# Altium PCB STM32_F4VX_M.PcbDoc
Units mil, origin at the board's own origin, x right, y up, seen from the top; angles counter-clockwise.
Board outline 5568 x 5116 mil, 2 copper layers (TopLayer, BottomLayer); 14 components, 100 nets, 250 pads, 0 vias.
Unrouted connection lines stored in the file: 138.
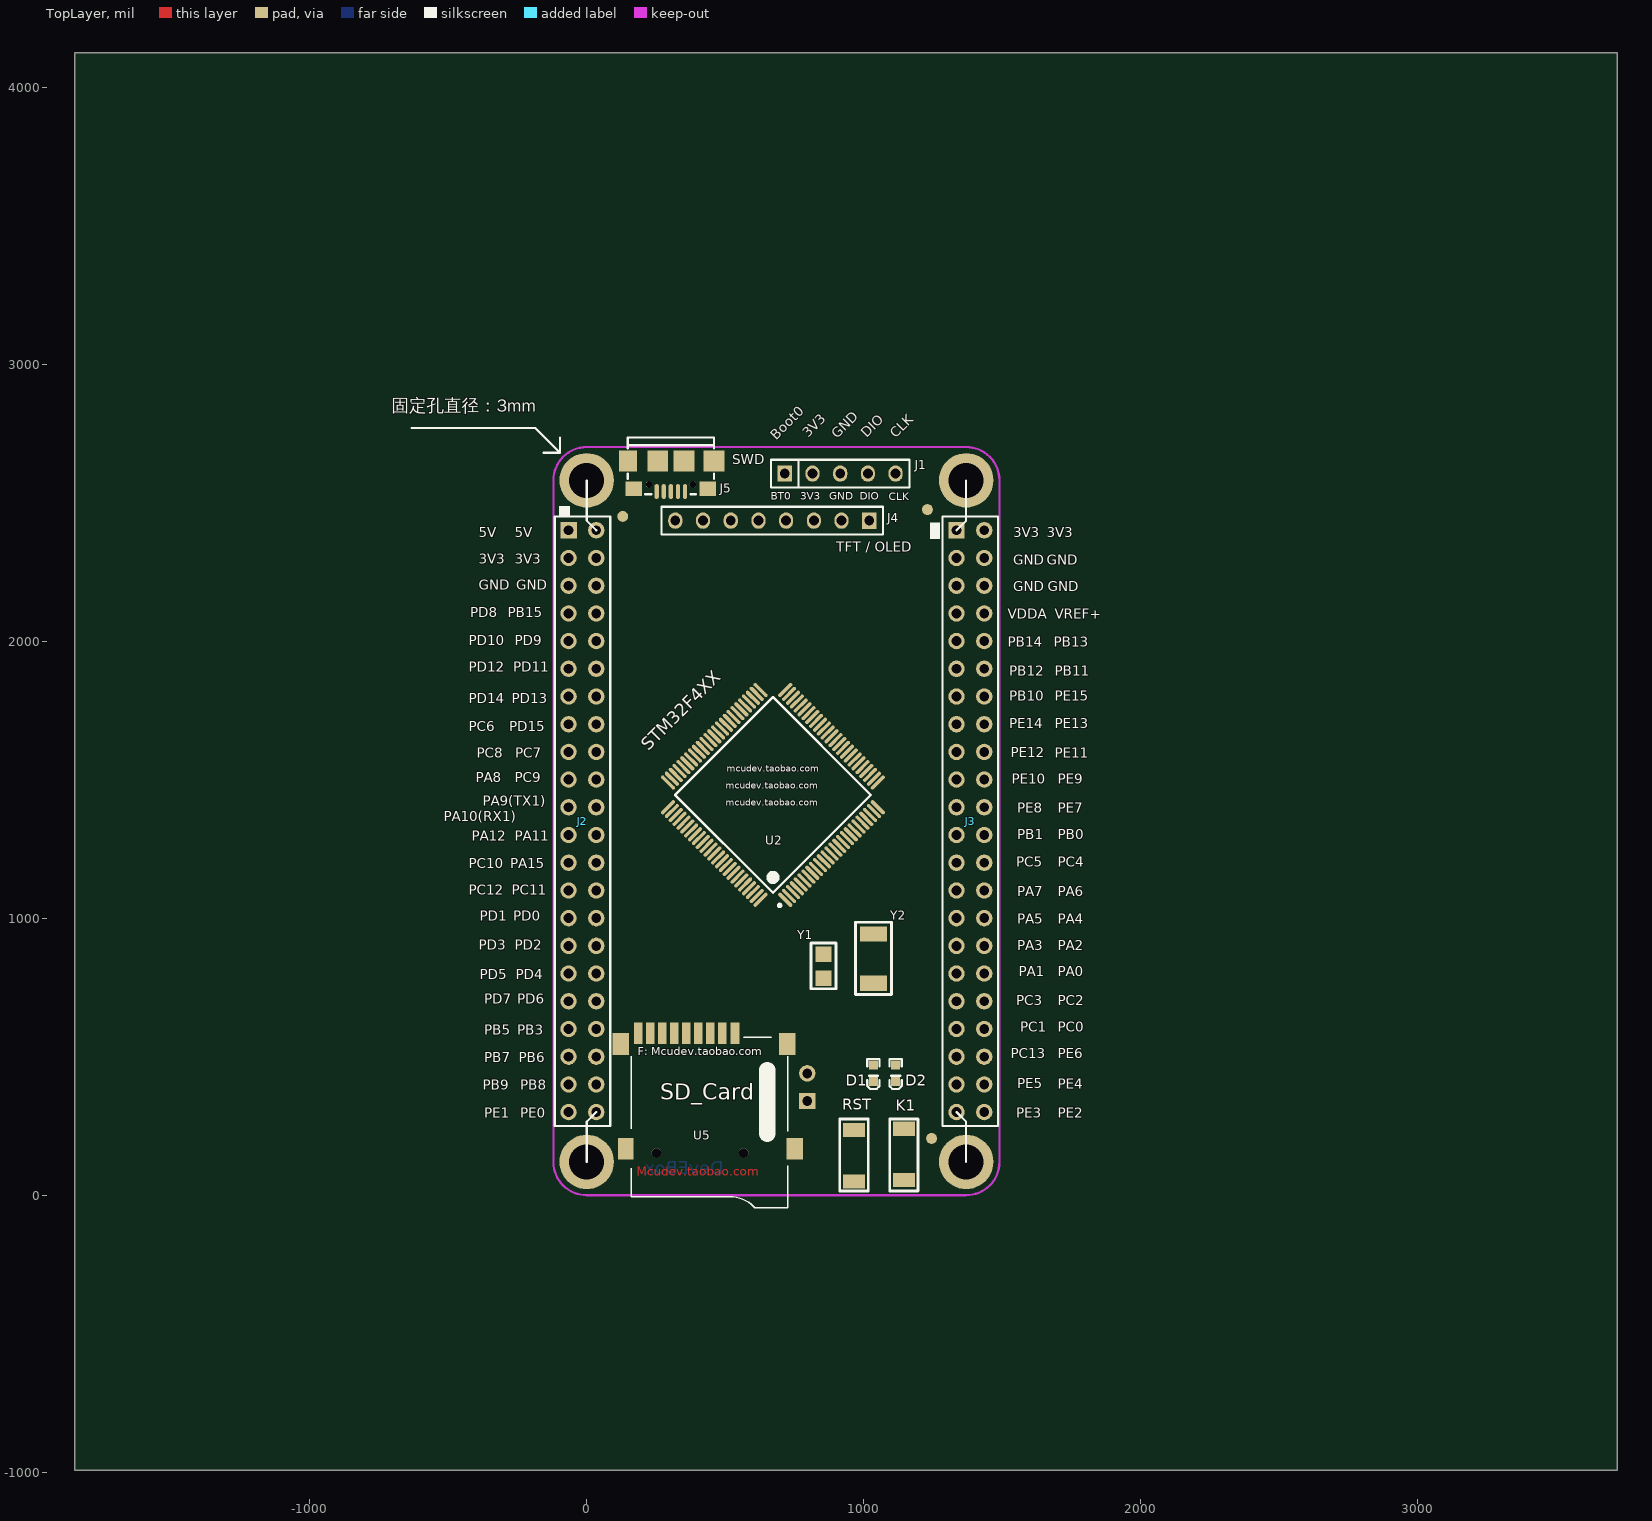
[diagram p0: TopLayer view]
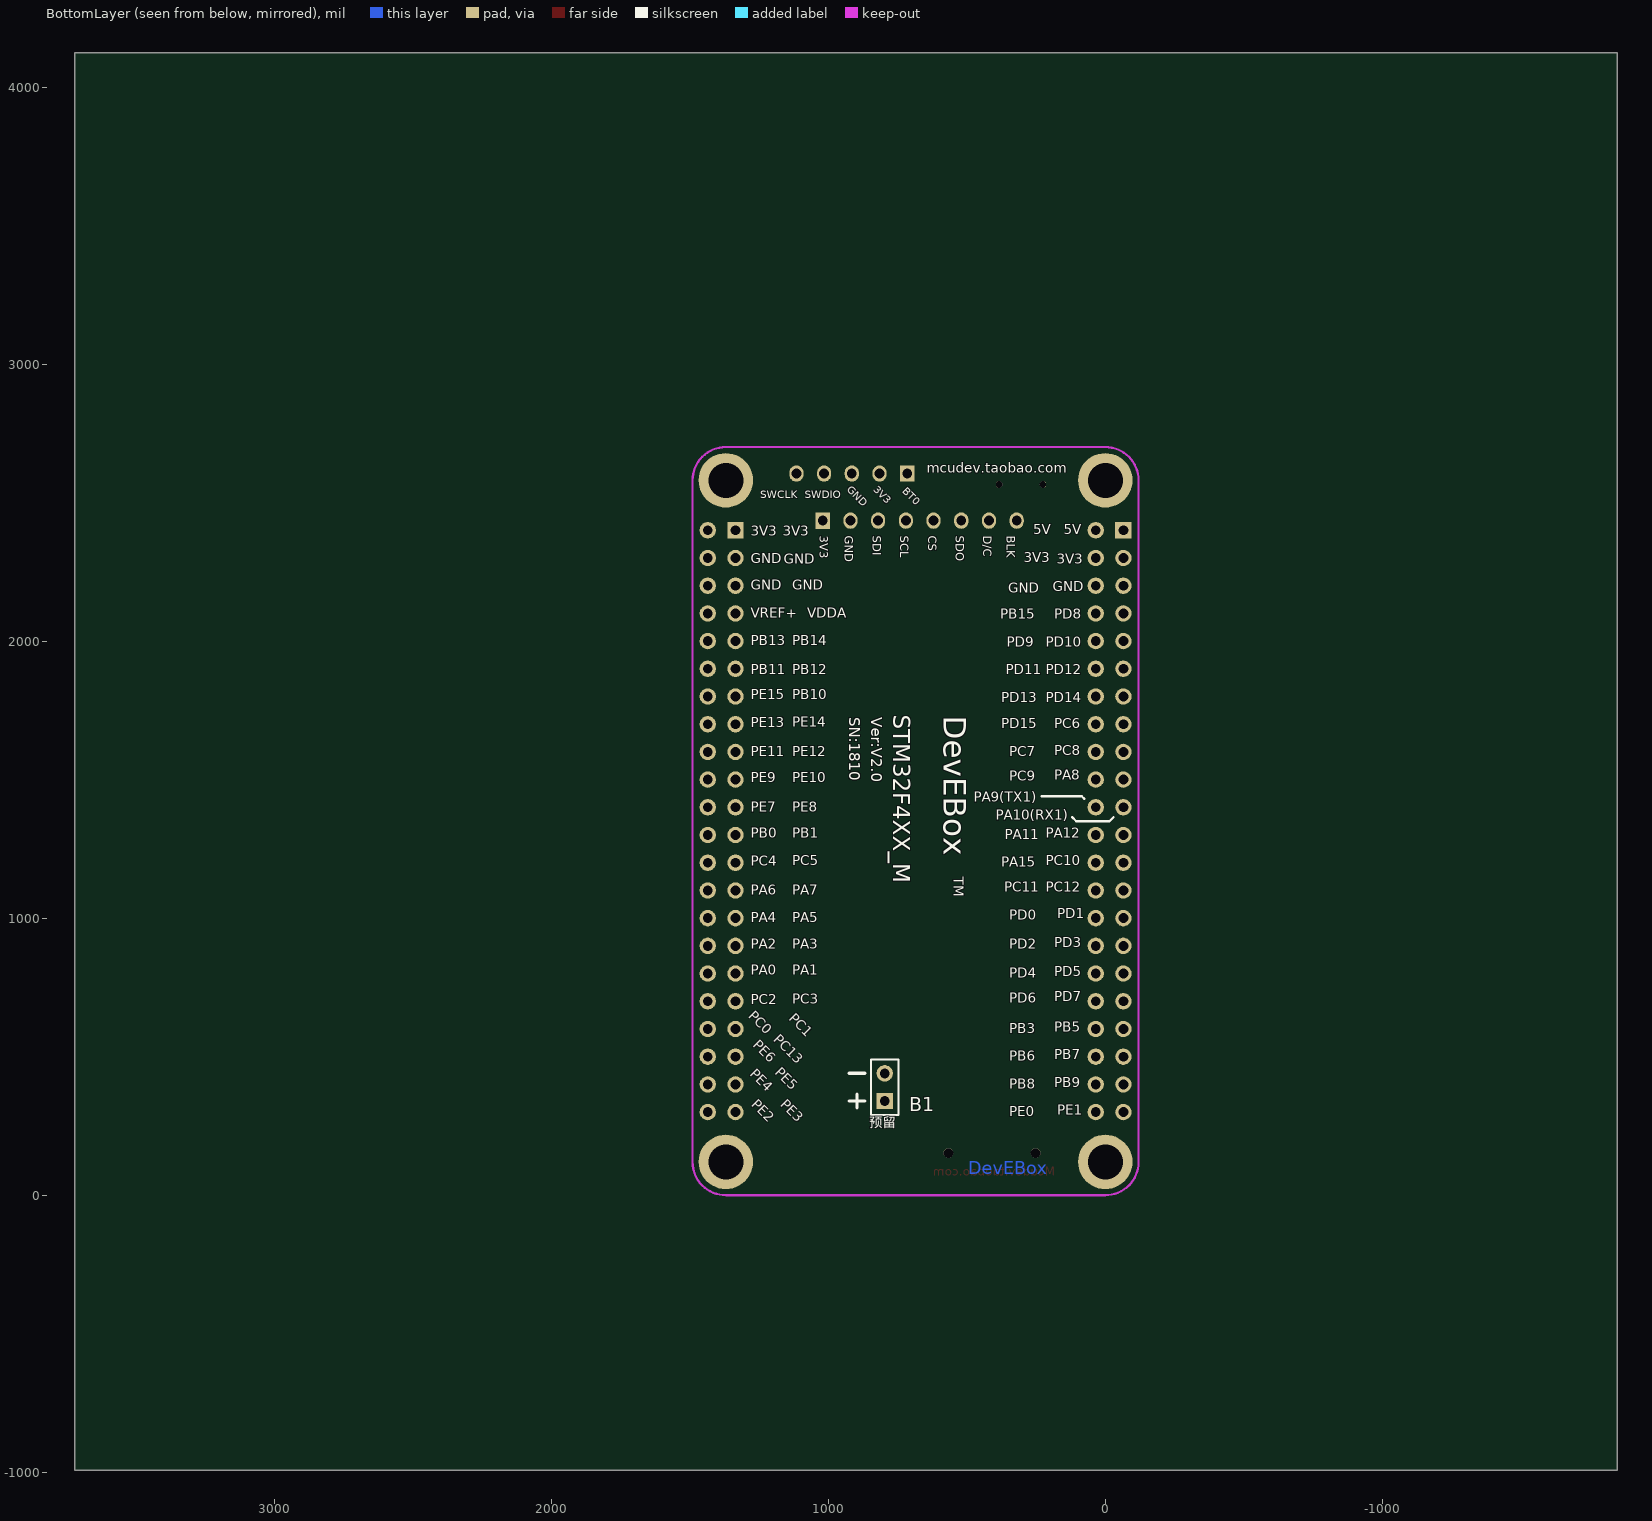
[diagram p1: BottomLayer view, seen from below]

## Layer stack, top to bottom
TopLayer: signal copper 1.4
Dielectric: core 12.6, FR-4, Dk 4.8
BottomLayer: signal copper 1.4

## Board outline
-1848,-992 -1848,4124 3720,4124 3720,-992

## Design rules (kind name [scope] priority, off if disabled: settings)
Clearance [All] p1: gap=7
ComponentClearance [All] p1: gap=1 collisioncheckmode=3 verticalgap=1 showdistances=FALSE
DiffPairsRouting DiffPairsRouting_1 [All] p2: maxlimit=10 minlimit=10 mostfreqgap=10 maxuncoupledlength=500
FabricationTestPointUsage TestPointUsage [All] p1: valid=0 allowmultiple=FALSE
FabricationTestPointUsage TestPointUsage_1 [All] p2: valid=0 allowmultiple=FALSE
FabricationTestpoint Testpoint [(IsPad And (OnTopLayer Or OnBottomLayer))] p1: side=3 testpointundercomponent=TRUE minsize=40 maxsize=100 preferedsize=60 minholesize=0 maxholesize=40 preferedholesize=32 testpointgrid=1 allowsidetop=TRUE allowsidebottom=TRUE usegrid=TRUE gridtolerance=0.01
FabricationTestpoint Testpoint_1 [(IsPad And (OnTopLayer Or OnBottomLayer))] p2: side=3 testpointundercomponent=TRUE minsize=40 maxsize=100 preferedsize=60 minholesize=20 maxholesize=40 preferedholesize=32 testpointgrid=1 allowsidetop=TRUE allowsidebottom=TRUE usegrid=TRUE gridtolerance=0.01
FanoutControl Fanout_LCC [IsLCC] p1: bgadir=Out bgaviamode=Centered fanoutstyle=Auto fanoutdirection=Alternating viagrid=1 // Fanout_LCC (Default Rule)
FanoutControl Fanout_BGA [IsBGA] p2: bgadir=Out bgaviamode=Centered fanoutstyle=Auto fanoutdirection=Alternating viagrid=1 // Fanout_BGA (Default Rule)
FanoutControl Fanout_Default [All] p4: bgadir=Out bgaviamode=Centered fanoutstyle=Auto fanoutdirection=Alternating viagrid=1 // Fanout_Default (Default Rule)
FanoutControl Fanout_Small [(CompPinCount < 5)] p5: bgadir=Out bgaviamode=Centered fanoutstyle=Auto fanoutdirection=OutThenIn viagrid=1 // Fanout_Small (Default Rule)
FanoutControl Fanout_BGA_1 [IsBGA] p6: bgadir=Out bgaviamode=Centered fanoutstyle=Auto fanoutdirection=Alternating viagrid=1 // Fanout_BGA (Default Rule)
FanoutControl Fanout_LCC_1 [IsLCC] p7: bgadir=Out bgaviamode=Centered fanoutstyle=Auto fanoutdirection=Alternating viagrid=1 // Fanout_LCC (Default Rule)
FanoutControl Fanout_SOIC_1 [IsSOIC] p8: bgadir=Out bgaviamode=Centered fanoutstyle=Auto fanoutdirection=Alternating viagrid=1 // Fanout_SOIC (Default Rule)
FanoutControl Fanout_Small_1 [(CompPinCount < 5)] p9: bgadir=Out bgaviamode=Centered fanoutstyle=Auto fanoutdirection=OutThenIn viagrid=1 // Fanout_Small (Default Rule)
FanoutControl Fanout_Default_1 [All] p10: bgadir=Out bgaviamode=Centered fanoutstyle=Auto fanoutdirection=Alternating viagrid=1 // Fanout_Default (Default Rule)
HoleSize HoleSize_1 [All] p2: absolutevalues=TRUE maxlimit=100 minlimit=1 maxpercent=80.000 minpercent=20.000
LayerPairs LayerPairs_1 [All] p2: enforce=TRUE
PasteMaskExpansion PasteMaskExpansion_1 [All] p2: expansion=0
PlaneClearance PlaneClearance_1 [All] p2: clearance=0
PlaneConnect [All] p1: planeconnectstyle=Direct reliefexpansion=20 reliefentries=4 reliefconductorwidth=10 reliefairgap=10
PolygonConnect [(InPadClass('All Pads'))] p1: connectstyle=Relief reliefconductorwidth=10 reliefentries=4 polygonreliefangle="90 Angle"
PolygonConnect PolygonConnect_1 [All] p2: connectstyle=Direct reliefconductorwidth=10 reliefentries=4 polygonreliefangle="90 Angle"
RoutingPriority RoutingPriority_1 [All] p2: routingpriority=0
RoutingTopology RoutingTopology_1 [All] p2: topology=Shortest
RoutingVias [All] p1: holewidth=12 width=20 viastyle="Through Hole" minholewidth=12 minwidth=20 maxholewidth=12 maxwidth=20
ShortCircuit ShortCircuit_1 [All] p2: allowed=FALSE
SilkscreenOverComponentPads [IsPad] p1: minsilkscreentomaskgap=10
SolderMaskExpansion [All] p1: expansion=4
SolderMaskExpansion SolderMaskExpansion_1 [All] p2: expansion=4
UnRoutedNet UnRoutedNet_1 [All] p2:
Width [All] p1: maxlimit=40 minlimit=7.87 preferedwidth=7.87 minimp=50.000000 maximp=50.000000 favimp=50.000000
19 further rules are at their usual default settings.

## Components (designator, comment, footprint, x,y, rotation, side; value= is the part's Value field where it differs from the comment)
B1 "BAT" SIP2-2.54mm 796,340 r90 bottom
D1 "LED" LED-0603 1035,470 r90 top
D2 "LED" LED-0603 1115,470 r90 top
J1 "SPI_1X5" SIP5-2.54mm 715,2605 r0 top
J2 "Header 22X2" IDE2X22 -65.21,2400.21 r270 top
J3 "Header 22X2" IDE2X22 1334.79,2400.21 r270 top
J4 "SIP8-2.54mm" HDR1X8 1020,2435 r180 top
J5 "Micro_USB" micro_USB 355,2540 r0 top
K1 "SW-PB" SW-SPST 1145,240 r270 top (schematic designator KUP)
RST "Key" SW-SPST 965,50 r90 top
U2 "STM32F407VET6" LQFP100 672.19,1445 r135 top
U5 "MiniSD" TF_SD 535,585 r180 top
Y1 "32.768K" JZ3215-32K 855,870 r270 top
Y2 "8M" JZ5032-8M 1035,765 r90 top

## Footprints (in the part's own frame and the unit in brackets; to place one, negate y for a bottom-side part, rotate by r counter-clockwise, add the part's x,y. Pads: shape width x height; smd on the part's side, far side on the other; paste and mask are expansions set on the pad)
HDR1X8 [mm] "Connector; Header; 8 Position"
  rect 1.3x1.5 hole 0.9: 1(0,0)
  oval 1.3x1.5 hole 0.9: 2(2.54,0) 3(5.08,0) 4(7.62,0) 5(10.16,0) 6(12.7,0) 7(15.24,0) 8(17.78,0)
  silkscreen extent -1.27,-1.27 19.05,1.27
IDE2X22 [mm]
  rect 1.5x1.5 hole 0.9: 1(0,0)
  round 1.5 hole 0.9: 2(0,2.54) 3(2.54,0) 4(2.54,2.54) 5(5.08,0) 6(5.08,2.54) 7(7.62,0) 8(7.62,2.54) 9(10.16,0) 10(10.16,2.54) 11(12.7,0) 12(12.7,2.54) 13(15.24,0) 14(15.24,2.54) 15(17.78,0) 16(17.78,2.54) 17(20.32,0) 18(20.32,2.54) 19(22.86,0) 20(22.86,2.54) 21(25.4,0) 22(25.4,2.54) 23(27.94,0) 24(27.94,2.54) 25(30.48,0) 26(30.48,2.54) 27(33.02,0) 28(33.02,2.54) 29(35.56,0) 30(35.56,2.54) 31(38.1,0) 32(38.1,2.54) 33(40.64,0) 34(40.64,2.54) 35(43.18,0) 36(43.18,2.54) 37(45.72,0) 38(45.72,2.54) 39(48.26,0) 40(48.26,2.54) 41(50.8,0) 42(50.8,2.54) 43(53.34,0) 44(53.34,2.54)
  silkscreen extent -1.27,-1.27 54.61,3.81
JZ3215-32K [mm]
  rect 1.4x1.5 smd paste-0.06 mask+0.05: 1(0,0) 2(2.2,0)
  silkscreen extent -1.02,-1.14 3.18,1.14
JZ5032-8M [mm]
  rect 1.4x2.5 smd: 1(0,0) 2(4.521,0)
  silkscreen extent -1.02,-1.65 5.59,1.65
LED-0603 [mil]
  rect 32x32 smd paste+0 mask+0: 1(0,0) 2(-60,0)
  silkscreen extent -86,-22 22,22
LQFP100 [mm] "LQFP, 100-Leads, Body 16.2x16.2mm (max), Pitch 0.50mm, IPC Medium Density"
  oval 1.7x0.33 smd: 1(-7.6,6) 2(-7.6,5.5) 3(-7.6,5) 4(-7.6,4.5) 5(-7.6,4) 6(-7.6,3.5) 7(-7.6,3) 8(-7.6,2.5) 9(-7.6,2) 10(-7.6,1.5) 11(-7.6,1) 12(-7.6,0.5) 13(-7.6,0) 14(-7.6,-0.5) 15(-7.6,-1) 16(-7.6,-1.5) 17(-7.6,-2) 18(-7.6,-2.5) 19(-7.6,-3) 20(-7.6,-3.5) 21(-7.6,-4) 22(-7.6,-4.5) 23(-7.6,-5) 24(-7.6,-5.5) 25(-7.6,-6) 51(7.6,-6) 52(7.6,-5.5) 53(7.6,-5) 54(7.6,-4.5) 55(7.6,-4) 56(7.6,-3.5) 57(7.6,-3) 58(7.6,-2.5) 59(7.6,-2) 60(7.6,-1.5) 61(7.6,-1) 62(7.6,-0.5) 63(7.6,0) 64(7.6,0.5) 65(7.6,1) 66(7.6,1.5) 67(7.6,2) 68(7.6,2.5) 69(7.6,3) 70(7.6,3.5) 71(7.6,4) 72(7.6,4.5) 73(7.6,5) 74(7.6,5.5) 75(7.6,6)
  oval 0.33x1.7 smd: 26(-6,-7.6) 27(-5.5,-7.6) 28(-5,-7.6) 29(-4.5,-7.6) 30(-4,-7.6) 31(-3.5,-7.6) 32(-3,-7.6) 33(-2.5,-7.6) 34(-2,-7.6) 35(-1.5,-7.6) 36(-1,-7.6) 37(-0.5,-7.6) 38(0,-7.6) 39(0.5,-7.6) 40(1,-7.6) 41(1.5,-7.6) 42(2,-7.6) 43(2.5,-7.6) 44(3,-7.6) 45(3.5,-7.6) 46(4,-7.6) 47(4.5,-7.6) 48(5,-7.6) 49(5.5,-7.6) 50(6,-7.6) 76(6,7.6) 77(5.5,7.6) 78(5,7.6) 79(4.5,7.6) 80(4,7.6) 81(3.5,7.6) 82(3,7.6) 83(2.5,7.6) 84(2,7.6) 85(1.5,7.6) 86(1,7.6) 87(0.5,7.6) 88(0,7.6) 89(-0.5,7.6) 90(-1,7.6) 91(-1.5,7.6) 92(-2,7.6) 93(-2.5,7.6) 94(-3,7.6) 95(-3.5,7.6) 96(-4,7.6) 97(-4.5,7.6) 98(-5,7.6) 99(-5.5,7.6) 100(-6,7.6)
  silkscreen extent -7.72,-6.35 6.35,6.85, body extent -7.05,-7.05 7.05,7.05, height 1.6
micro_USB [mm]
  oval 0.4x1.35 smd: 1(0,0) 2(-0.65,0) 3(-1.3,0) 4(-1.95,0) 5(-2.6,0)
  rect 1.651x1.9 smd: 6(-5.25,2.794)
  rect 1.5x1.3 smd: 6(-4.699,0.254) 9(2.099,0.254)
  rect 1.9x1.9 smd: 7(-2.5,2.794) 8(-0.1,2.794) 9(2.65,2.794)
  round 0.6 hole 0.6: ""(-3.3,0.644) ""(0.7,0.644)
  silkscreen extent -5.25,-0.25 2.65,4.94
SIP2-2.54mm [mm]
  rect 1.5x1.5 hole 0.9: 1(0,0)
  round 1.5 hole 0.9: 2(2.54,0)
  silkscreen extent -1.27,-1.27 3.81,1.27
SIP5-2.54mm [mm]
  rect 1.3x1.5 hole 0.9: 1(0,0)
  oval 1.3x1.5 hole 0.9: 2(2.54,0) 3(5.08,0) 4(7.62,0) 5(10.16,0)
  silkscreen extent -1.27,-1.27 11.43,1.27
SW-SPST [mm]
  rect 1.3x2 smd paste+0 mask+0.2: 1(0,0) 2(4.7,0)
  silkscreen extent -0.89,-1.3 5.72,1.3
TF_SD [mm]
  round 0.9 hole 0.9 unplated: 0(-0.8,11) 0(7.2,11)
  rect 0.85x2 smd: 1(0,0)
  rect 0.8x2 smd: 2(1.15,0) 3(2.25,0) 4(3.35,0) 5(4.45,0) 6(5.55,0) 7(6.65,0) 8(7.75,0) 9(8.85,0)
  rect 1.5x2 smd: 10(-5.5,10.6) 10(-4.8,1) 10(10.45,1)
  rect 1.4x2 smd: 10(10,10.6)
  silkscreen extent -4.87,0.36 9.49,16

## Part data
B1: library part BATTERY
J1: library part "Header 5H", "Header, 5-Pin, Right Angle"
J2 J3: "Header, 22-Pin, Dual row"
J4: library part "Header 8", "Header, 8-Pin"
J5: library part MiniUSB
RST: library part SW-PB
Y1: library part CRYSTAL, "晶振"
Y2: library part CRYSTAL, "Crystal"

## Free pads (board coordinates)
  round 196.85 hole 125.98: ""(0,120.21) ""(0,2580.21) ""(1369.58,120.21) ""(1369.58,2580.21)
  round 39.37 smd: ""(130,2450) ""(1230,2475) ""(1245,205)

## Nets (pads, with @x,y where several pads share a name; then routed paths per layer and width w, separated by ;. In a path a pad name is that pad's centre, name@x,y a point inside that pad or via, vN(x,y) a via of type N, cw(c..) or ccw(c..) an arc to the next point about the centre after c; other vN are vias at no path point)
3V3: D2.1 J1.2 J2.3 J2.4 J3.1 J3.2 J4.1 U2.11 U2.19 U2.28 U2.50 U2.75 U2.100 U5.4
5V: J2.1 J2.2
BOOT0: J1.1 U2.94
F_CS: J2.26 U2.77
GND: B1.2 D1.2 J1.3 J2.5 J2.6 J3.3 J3.4 J3.5 J3.6 J4.2 J5.5 J5.6 J5.7 J5.8 J5.9 RST.1 U2.10 U2.20 U2.27 U2.74 U2.99 U5.6 U5.10
KEY0: J3.44 U2.1
NetB1_1: B1.1
NetC10_2: U2.12 Y2.1
NetC11_1: U2.13 Y2.2
NetC21_2: U2.49
NetC22_2: U2.73
NetD1_1: D1.1
NetD2_2: D2.2
NetJ5_1: J5.1
NetJ5_2: J5.2
NetJ5_3: J5.3
NetK1_1: K1.1
PA0/WK_UP: J3.34 K1.2 U2.23
PA1: J3.33 U2.24
PA2: J3.32 U2.25
PA3: J3.31 U2.26
PA4: J3.30 U2.29
PA5: J3.29 U2.30
PA6: J3.28 U2.31
PA7: J3.27 U2.32
PA8: J2.19 U2.67
PA9/TXD1: J2.22 U2.68
PA10/RXD1: J2.21 U2.69
PA11/USB_DM: J2.24 U2.70
PA12/USB_DP: J2.23 U2.71
PA13_SWDIO: J1.4 U2.72
PA14_SWCLK: J1.5 U2.76
PB0: J3.24 U2.35
PB1: J3.23 J4.8 U2.36
PB2/BOOT1: U2.37
PB3/TDO: J2.38 U2.89
PB4/TRST: U2.90
PB5: J2.37 U2.91
PB6: J2.40 U2.92
PB7: J2.39 U2.93
PB8: J2.42 U2.95
PB9: J2.41 U2.96
PB10: J3.13 U2.47
PB11: J3.12 U2.48
PB12: J3.11 J4.5 U2.51
PB13: J3.10 J4.4 U2.52
PB14: J3.9 J4.6 U2.53
PB15: J2.8 J4.3 U2.54
PC0: J3.38 U2.15
PC1: J3.37 U2.16
PC2: J3.36 U2.17
PC3: J3.35 U2.18
PC4: J3.26 U2.33
PC5: J3.25 J4.7 U2.34
PC6: J2.15 U2.63
PC7: J2.18 U2.64
PC8: J2.17 U2.65 U5.7
PC9: J2.20 U2.66 U5.8
PC10: J2.25 U2.78 U5.1
PC11: J2.28 U2.79 U5.2
PC12: J2.27 U2.80 U5.5
PC13: J3.39 U2.7
PC14: U2.8 Y1.2
PC15: U2.9 Y1.1
PD0: J2.30 U2.81
PD1: J2.29 U2.82
PD2: J2.32 U2.83 U5.3
PD3: J2.31 U2.84
PD4: J2.34 U2.85
PD5: J2.33 U2.86
PD6: J2.36 U2.87
PD7: J2.35 U2.88
PD8: J2.7 U2.55
PD9: J2.10 U2.56
PD10: J2.9 U2.57
PD11: J2.12 U2.58
PD12: J2.11 U2.59
PD13: J2.14 U2.60
PD14: J2.13 U2.61
PD15: J2.16 U2.62
PE0: J2.44 U2.97
PE1: J2.43 U2.98
PE3: J3.43 U2.2
PE4: J3.42 U2.3
PE5: J3.41 U2.4
PE6: J3.40 U2.5
PE7: J3.22 U2.38
PE8: J3.21 U2.39
PE9: J3.20 U2.40
PE10: J3.19 U2.41
PE11: J3.18 U2.42
PE12: J3.17 U2.43
PE13: J3.16 U2.44
PE14: J3.15 U2.45
PE15: J3.14 U2.46
RST: RST.2 U2.14
SD_NC: U5.9
VBAT: U2.6
VDDA: J3.7 U2.22
VREF+: J3.8 U2.21
pads on no net: J5. J5.4 U5.0

## Keep-outs
KeepOutLayer:
  lines w8: -120.21,120.21 ccw(c0,120.21) 0,0 1369.58,0 ccw(c1369.58,120.21) 1489.79,120.21 1489.79,2580.21 ccw(c1369.58,2580.21) 1369.58,2700.42 0,2700.42 ccw(c0,2580.21) -120.21,2580.21 -120.21,120.21

## Other copper
TopLayer:
  text "Mcudev.taobao.com" at 180,60 h55
BottomLayer:
  text "DevEBox" at 495,60 h80

## Silkscreen, mask and mechanical layers (free items; w line width, h text height)
TopOverlay:
  rectangle: 1240,2368 1276,2428
  rectangle: -99.82,2450.21 -60,2487.35
  lines w8: -631.67,2769.67 -185.67,2769.67 -96,2680 ; -156,2680 -96,2680 ; -96,2735 -96,2680 ; 0,120.21 0,265.42 34.79,300.21 ; 0,2580.21 0,2435 34.79,2400.21 ; 1334.79,300.21 1369.58,265.42 1369.58,120.21 ; 1334.79,2400.21 1369.58,2435 1369.58,2580.21
  text "固定孔直径：3mm" at -704,2812 h80
  text "DIO" at 1010.98,2732.2 h35 r45
  text "3V3" at 800,2732 h35 r45
  text "CLK" at 1114.91,2730.15 h35 r45
  text "GND" at 904,2728 h35 r45
  text "Boot0" at 684,2724 h35 r45
  text "SWD" at 525,2625 h60
  text "BT0" at 665,2510 h28
  text "3V3" at 770,2510 h28
  text "GND" at 875,2510 h28
  text "DIO" at 985,2510 h28
  text "CLK" at 1091,2509 h28
  text "5V" at -260.21,2375.42 h35
  text "3V3" at 1539.79,2375.42 h35
  text "3V3" at 1659.79,2375.42 h35
  text "5V" at -390,2375 h35
  text "TFT / OLED" at 900,2310.13 h60
  text "3V3" at -390,2280 h35
  text "3V3" at -260,2280 h35
  text "GND" at 1539.79,2275.42 h35
  text "GND" at 1659.79,2275.42 h35
  text "GND" at -390,2185 h35
  text "GND" at -255,2185 h35
  text "GND" at 1539.79,2180.42 h35
  text "GND" at 1664.79,2180.42 h35
  text "PD8" at -420.21,2085.42 h35
  text "PB15" at -285.21,2085.42 h35
  text "VDDA" at 1520,2080 h35
  text "VREF+" at 1690,2080 h35
  text "PD10" at -425,1985 h35
  text "PD9" at -260,1985 h35
  text "PB14" at 1520,1980 h35
  text "PB13" at 1685,1980 h35
  text "PD12" at -425.21,1890.42 h35
  text "PD11" at -265,1890 h35
  text "PB12" at 1525,1875 h35
  text "PB11" at 1690,1875 h35
  text "PB10" at 1524.79,1785.42 h35
  text "PE15" at 1690,1785 h35
  text "PD13" at -270.21,1775.42 h35
  text "PD14" at -425,1775 h35
  text "PE14" at 1524.79,1685.42 h35
  text "PE13" at 1690,1685 h35
  text "PD15" at -280.21,1675.42 h35
  text "PC6" at -425,1675 h35
  text "STM32F4XX" at 235,1590 h80 r45
  text "PE12" at 1529.79,1580.42 h35
  text "PC7" at -257.53,1579.38 h35
  text "PE11" at 1690,1580 h35
  text "PC8" at -396.59,1579.04 h35
  text "mcudev.taobao.com" at 504.79,1520.21 h40
  text "PA8" at -400.21,1490.42 h35
  text "PC9" at -260.21,1490.42 h35
  text "PE10" at 1534.79,1485.42 h35
  text "PE9" at 1700,1485 h35
  text "mcudev.taobao.com" at 502.31,1457.9 h40
  text "PA9(TX1)" at -375,1405 h35
  text "mcudev.taobao.com" at 501.49,1397.6 h40
  text "PE8" at 1555,1380 h35
  text "PE7" at 1700,1380 h35
  text "PA10(RX1)" at -515,1350 h35
  text "PB1" at 1555,1285 h35
  text "PB0" at 1700,1285 h35
  text "PA12" at -415.21,1280.42 h35
  text "PA11" at -260,1280 h35
  text "PC5" at 1549.79,1185.42 h35
  text "PC4" at 1700,1185 h35
  text "PC10" at -425.21,1180.42 h35
  text "PA15" at -275.21,1180.42 h35
  text "PC12" at -425.21,1085.42 h35
  text "PC11" at -270.21,1085.42 h35
  text "PA7" at 1555,1080 h35
  text "PA6" at 1700,1080 h35
  text "PD1" at -385.21,990.16 h35
  text "PD0" at -265.21,990.16 h35
  text "PA5" at 1555,980 h35
  text "PA4" at 1700,980 h35
  text "PD3" at -390.21,885.42 h35
  text "PD2" at -260.21,885.42 h35
  text "PA3" at 1555,885 h35
  text "PA2" at 1700,885 h35
  text "PA1" at 1559.79,790.42 h35
  text "PA0" at 1700,790 h35
  text "PD5" at -385.21,780.42 h35
  text "PD4" at -255.21,780.42 h35
  text "PD7" at -370.21,690.42 h35
  text "PD6" at -250.21,690.42 h35
  text "PC3" at 1549.79,685.42 h35
  text "PC2" at 1700,685 h35
  text "PC1" at 1565,590 h35
  text "PC0" at 1700,590 h35
  text "PB5" at -370,580 h35
  text "PB3" at -250,580 h35
  text "F: Mcudev.taobao.com" at 185,495 h50
  text "PC13" at 1530,495 h35
  text "PE6" at 1700,495 h35
  text "PB7" at -370,480 h35
  text "PB6" at -245,480 h35
  text "PE5" at 1554.79,385.42 h35
  text "PE4" at 1700,385 h35
  text "PB9" at -375,380 h35
  text "PB8" at -240,380 h35
  text "SD_Card" at 265,325.25 h100
  text "PE3" at 1549.79,280.42 h35
  text "PE1" at -370,280 h35
  text "PE0" at -240,280 h35
  text "PE2" at 1700,280 h35
BottomOverlay:
  lines w8: -30,1365 -15,1350 105,1350 120,1365 ; 75,1430 85,1440 230,1440
  lines w12: 868,340 924,340 ; 868,440 924,440 ; 896,316 896,364
  text "mcudev.taobao.com" at 645,2595 h60
  text "3V3" at 840,2545 h28 r45
  text "GND" at 935,2545 h28 r45
  text "BT0" at 735,2540 h28 r45
  text "SWDIO" at 1085,2515 h28
  text "SWCLK" at 1245,2515 h28
  text "5V" at 150.01,2385 h35
  text "5V" at 260,2385 h35
  text "3V3" at 1280.21,2380.42 h35
  text "BLK" at 355,2380 h30 r90
  text "D/C" at 440,2380 h30 r90
  text "SDO" at 540,2380 h30 r90
  text "CS" at 640,2380 h30 r90
  text "SCL" at 740,2380 h30 r90
  text "SDI" at 840,2380 h30 r90
  text "GND" at 940,2380 h30 r90
  text "3V3" at 1030,2380 h30 r90
  text "3V3" at 1165,2380 h35
  text "3V3" at 295,2285 h35
  text "GND" at 1280.21,2280.42 h35
  text "3V3" at 175,2280 h35
  text "GND" at 1160,2280 h35
  text "GND" at 1130,2185.42 h35
  text "GND" at 1280.21,2185.42 h35
  text "GND" at 190,2180 h35
  text "GND" at 350,2175 h35
  text "VDDA" at 1075,2085 h35
  text "VREF+" at 1280.21,2085 h35
  text "PD8" at 185,2080 h35
  text "PB15" at 380,2080 h35
  text "PB14" at 1130,1985 h35
  text "PB13" at 1280.21,1985 h35
  text "PD10" at 215,1980 h35
  text "PD9" at 355,1980 h35
  text "PD12" at 215,1880 h35
  text "PD11" at 360,1880 h35
  text "PB12" at 1130,1880 h35
  text "PB11" at 1280.21,1880 h35
  text "PB10" at 1130,1790.42 h35
  text "PE15" at 1280.21,1790 h35
  text "PD14" at 215,1780 h35
  text "PD13" at 375,1780 h35
  text "STM32F4XX_M" at 765,1735 h60 r90
  text "DevEBox" at 610,1730 h140 r90
  text "Ver:V2.0" at 845,1725 h40 r90
  text "SN:1810" at 925,1725 h40 r90
  text "PE14" at 1130,1690.42 h35
  text "PE13" at 1280.21,1690 h35
  text "PC6" at 185,1685 h35
  text "PD15" at 375,1685 h35
  text "PC8" at 185,1589.04 h35
  text "PE12" at 1130,1585.42 h35
  text "PC7" at 346.05,1584.38 h35
  text "PE11" at 1280.21,1585 h35
  text "PA8" at 185,1500.42 h35
  text "PC9" at 346.05,1495.42 h35
  text "PE10" at 1130,1490.42 h35
  text "PE9" at 1280.21,1490 h35
  text "PA9(TX1)" at 475,1420 h35
  text "PE8" at 1130,1385 h35
  text "PE7" at 1280.21,1385 h35
  text "PA10(RX1)" at 395,1355 h35
  text "PA12" at 214.16,1290.42 h35
  text "PB1" at 1130,1290 h35
  text "PB0" at 1280.21,1290 h35
  text "PA11" at 363.55,1285 h35
  text "PC10" at 214.16,1190.42 h35
  text "PC5" at 1130,1190.42 h35
  text "PC4" at 1280.21,1190 h35
  text "PA15" at 375.21,1185.42 h35
  text "TM" at 560,1150 h60 r90
  text "PC12" at 214.16,1095.42 h35
  text "PC11" at 365,1095 h35
  text "PA7" at 1130,1085 h35
  text "PA6" at 1280.21,1085 h35
  text "PD1" at 173.34,1000.16 h35
  text "PD0" at 346.05,995.16 h35
  text "PA5" at 1130,985 h35
  text "PA4" at 1280.21,985 h35
  text "PD3" at 185,895.42 h35
  text "PD2" at 346.05,890.42 h35
  text "PA3" at 1130,890 h35
  text "PA2" at 1280.21,890 h35
  text "PA1" at 1130,795.42 h35
  text "PA0" at 1280.21,795 h35
  text "PD5" at 185,790.42 h35
  text "PD4" at 346.05,785.42 h35
  text "PD7" at 185,700.42 h35
  text "PD6" at 346.05,695.42 h35
  text "PC3" at 1130,690.42 h35
  text "PC2" at 1280.21,690 h35
  text "PC0" at 1290,645 h35 r45
  text "PC1" at 1145,635 h35 r45
  text "PB5" at 185,590 h35
  text "PB3" at 346.05,585 h35
  text "PC13" at 1200,560 h35 r45
  text "PE6" at 1275,540 h35 r45
  text "PB7" at 185,490 h35
  text "PB6" at 346.05,485 h35
  text "PE5" at 1195,440 h35 r45
  text "PE4" at 1285,435 h35 r45
  text "PB9" at 185,390 h35
  text "PB8" at 346.05,385 h35
  text "PE3" at 1175,325 h35 r45
  text "PE2" at 1280,325 h35 r45
  text "PE1" at 173.34,290 h35
  text "PE0" at 346.05,285 h35
  text "预留" at 852,232 h60

## Dimensions
1369.58,120.21 to 1369.58,2580.21 on TopOverlay
0,120.21 to 1369.58,120.21 on TopOverlay
-120.21,120.21 to 1489.79,120.21 on TopOverlay
1369.58,0 to 1369.58,2700.42 on TopOverlay